# EAGLE board DualHBridge-ULN2803-1.0 (EAGLE 6.4)
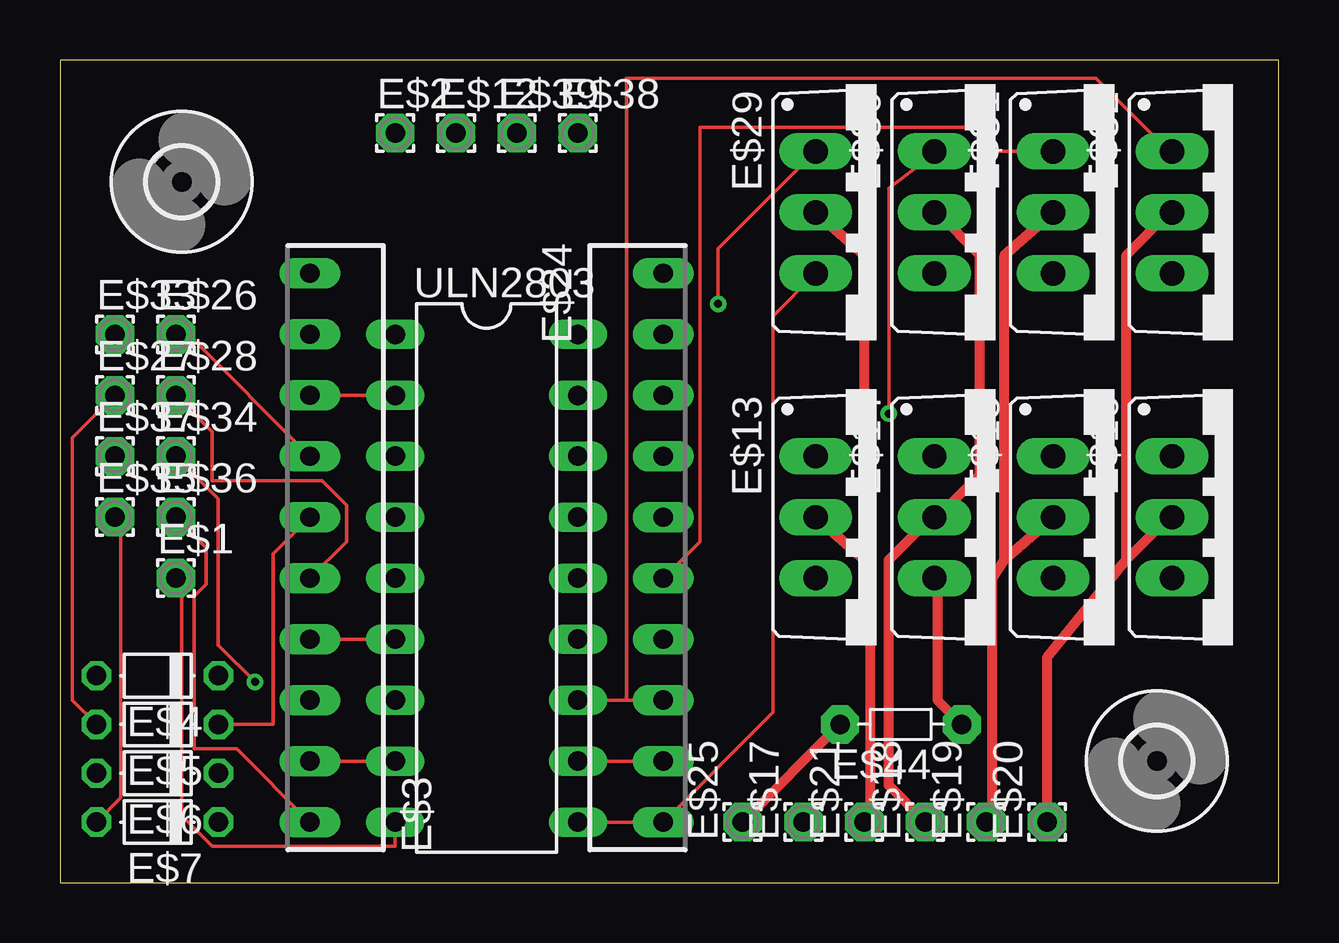
[diagram p0: board, top side]
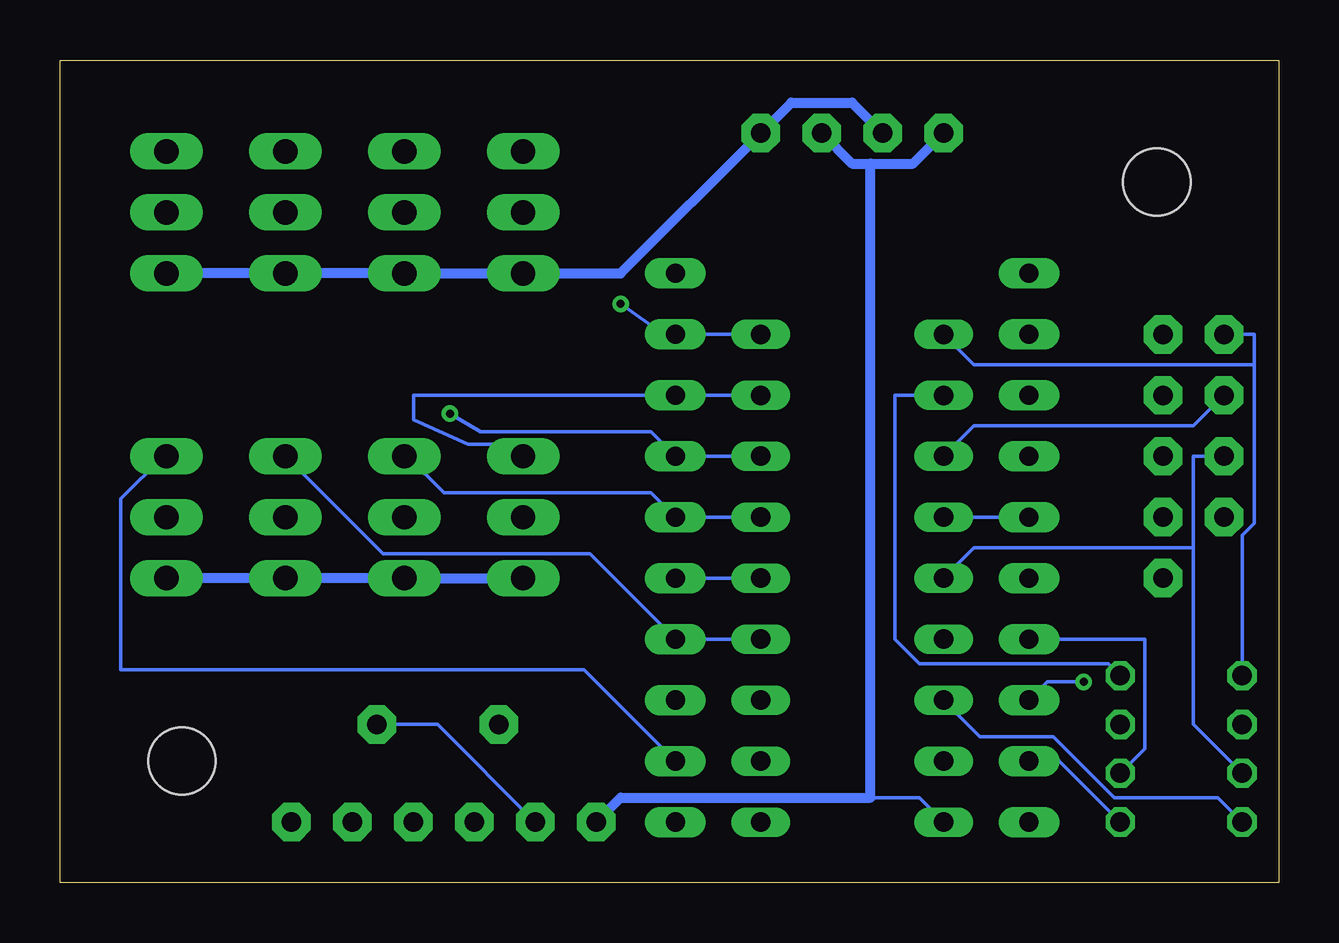
[diagram p1: board, bottom side, seen from below]

Size 50.8 x 34.29 mm. Coordinates in mm from the lower left corner, seen from the top.
Outline: 0,34.29 0,0 50.8,0 50.8,34.29 0,34.29
Copper layers (1*16): Top 0.0356mm / dielectric 1.5011mm / Bottom 0.0356mm
Design rules "LaenPCBOrder": minimum track width 6mil, minimum drill 13mil, track to track 6mil, track to pad 6mil, pad to pad 6mil, via to via 6mil, smd to smd 6mil, copper to edge 15mil, drill to drill 6mil, minimum pad ring 7mil, minimum via ring 7mil, stop-mask expansion 4mil, vias tented up to drill 0mil, thermal gap 10mil

## Footprints (pad centres in the part's own frame; a part is rotated, then mirrored left to right if it is on the bottom)
1,6/0,8 = drill 0.813 pad 1.6 octagon: 1 0,0
SIP-10 = drill 0.8 pad 1.27 long: 1 -11.43,0; 2 -8.89,0; 3 -6.35,0; 4 -3.81,0; 5 -1.27,0; 6 1.27,0; 7 3.81,0; 8 6.35,0; 9 8.89,0; 10 11.43,0
D-5 = drill 0.813 octagon: A 2.54,0; C -2.54,0
TO220V = drill 1.016 long: 1 -2.54,-2.54; 2 0,-2.54; 3 2.54,-2.54
2,8 = hole 2.8: 0,0
R-5 = drill 0.813 pad 1.6 octagon: 1 -2.54,0; 2 2.54,0
DIL18 = drill 0.813 long: 1 -10.16,-3.81; 2 -7.62,-3.81; 3 -5.08,-3.81; 4 -2.54,-3.81; 5 0,-3.81; 6 2.54,-3.81; 7 5.08,-3.81; 8 7.62,-3.81; 9 10.16,-3.81; 10 10.16,3.81; 11 7.62,3.81; 12 5.08,3.81; 13 2.54,3.81; 14 0,3.81; 15 -2.54,3.81; 16 -5.08,3.81; 17 -7.62,3.81; 18 -10.16,3.81

## Placement (x,y rotation side)
E$1  [1,6/0,8]  4.83,12.7 0 top
E$2  [1,6/0,8]  13.97,31.24 0 top
E$3  [SIP-10]  10.41,13.97 90 top
E$4  [D-5]  4.06,8.64 180 top
E$5  [D-5]  4.06,6.6 180 top
E$6  [D-5]  4.06,4.57 180 top
E$7  [D-5]  4.06,2.54 180 top
E$12  [1,6/0,8]  16.51,31.24 0 top
E$13  [TO220V]  34.04,15.24 270 top
E$14  [TO220V]  38.99,15.24 270 top
E$15  [TO220V]  43.94,15.24 270 top
E$16  [TO220V]  48.9,15.24 270 top
E$17  [1,6/0,8]  30.99,2.54 90 top
E$18  [1,6/0,8]  36.07,2.54 90 top
E$19  [1,6/0,8]  38.61,2.54 90 top
E$20  [1,6/0,8]  41.15,2.54 90 top
E$21  [1,6/0,8]  33.53,2.54 90 top
E$24  [SIP-10]  25.15,13.97 270 top
E$25  [1,6/0,8]  28.45,2.54 90 top
E$26  [1,6/0,8]  4.83,22.86 0 top
E$27  [1,6/0,8]  2.29,20.32 0 top
E$28  [1,6/0,8]  4.83,20.32 0 top
E$29  [TO220V]  34.04,27.94 270 top
E$30  [TO220V]  38.99,27.94 270 top
E$31  [TO220V]  43.94,27.94 270 top
E$32  [TO220V]  48.9,27.94 270 top
E$33  [1,6/0,8]  2.29,22.86 0 top
E$34  [1,6/0,8]  4.83,17.78 0 top
E$35  [1,6/0,8]  2.29,15.24 0 top
E$36  [1,6/0,8]  4.83,15.24 0 top
E$37  [1,6/0,8]  2.29,17.78 0 top
E$38  [1,6/0,8]  21.59,31.24 0 top
E$39  [1,6/0,8]  19.05,31.24 0 top
E$40  [2,8]  5.08,29.21 0 top
E$42  [2,8]  45.72,5.08 0 top
E$44  [R-5]  35.05,6.6 180 top
ULN2803  ULN2803  [DIL18]  17.78,12.7 270 top

## Library data of the parts
E$1 E$2 E$12 E$17-E$21 E$25-E$28 E$33-E$39 = wirepad
E$3 E$24 = linear
E$4-E$7 = diode
E$13-E$16 E$29-E$32 = transistor-pnp
E$40 E$42 = holes
E$44 = discrete
ULN2803 = 40xx

## Nets
S$1: E$12.1 E$24.10 E$29.3 E$30.3 E$31.3 E$32.3 E$38.1 ULN2803.10
S$2: E$3.7 E$26.1
S$3: E$3.8 E$4.C ULN2803.2
S$4: E$3.6 E$5.C ULN2803.4
S$5: E$3.4 E$6.C ULN2803.6
S$6: E$24.2 E$29.1 ULN2803.18
S$7: E$24.6 E$31.1 ULN2803.14
S$8: E$13.1 E$24.3 ULN2803.17
S$9: E$24.4 E$30.1 ULN2803.16
S$10: E$14.1 E$24.5 ULN2803.15
S$11: E$4.A E$33.1 ULN2803.1
S$12: E$1.1 E$2.1 E$25.1 E$39.1 E$44.2 ULN2803.9
S$13: E$15.1 E$24.7 ULN2803.13
S$14: E$24.8 E$32.1 ULN2803.12
S$15: E$16.1 E$24.9 ULN2803.11
S$16: E$3.5 E$28.1
S$17: E$5.A E$27.1 ULN2803.3
S$18: E$3.3 E$34.1
S$19: E$6.A E$37.1 ULN2803.5
S$20: E$3.1 E$36.1
S$21: E$7.A E$35.1 ULN2803.7
S$22: E$3.2 E$7.C ULN2803.8
S$24: E$13.3 E$14.3 E$15.3 E$16.3 E$17.1 E$44.1
S$25: E$13.2 E$21.1 E$29.2
S$26: E$14.2 E$18.1 E$30.2
S$27: E$15.2 E$19.1 E$31.2
S$28: E$16.2 E$20.1 E$32.2

## Tracks (layer width: path | path; a pad name or v marks a point on that pad's centre or on a via)
S$1
  Top 0.152: ULN2803.10 E$24.10 29.72,7.11 29.72,23.62 E$29.3
  Bottom 0.406: E$12.1 17.78,32.51 20.32,32.51 E$38.1 27.43,25.4 E$29.3 E$30.3 E$31.3 E$32.3
S$2
  Top 0.152: E$3.7 5.33,22.86 E$26.1
S$3
  Top 0.152: ULN2803.2 E$3.8
  Bottom 0.152: E$4.C 7.11,9.14 14.99,9.14 16,10.16 16,20.32 ULN2803.2
S$4
  Top 0.152: E$5.C 8.89,6.6 8.89,13.72 E$3.6
  Bottom 0.152: E$3.6 ULN2803.4
S$5
  Top 0.152: E$3.4 ULN2803.6
  Bottom 0.152: E$6.C 5.59,5.59 5.59,10.16 E$3.4
S$6  (via drill 0.33)
  Top 0.152: E$29.1 27.43,26.42 v27.43,24.13
  Bottom 0.152: ULN2803.18 E$24.2 25.65,22.86 v27.43,24.13
S$7
  Top 0.152: E$31.1 38.35,30.48 38.35,30.99 37.85,31.5 26.67,31.5 26.67,14.22 E$24.6
  Bottom 0.152: E$24.6 ULN2803.14
S$8
  Bottom 0.152: ULN2803.17 E$24.3 36.07,20.32 36.07,19.3 33.78,18.29 32,18.29 E$13.1
S$9  (via drill 0.33)
  Top 0.152: v34.54,19.56 34.54,28.96 36.58,30.48 E$30.1
  Bottom 0.152: ULN2803.16 E$24.4 26.16,18.8 33.27,18.8 v34.54,19.56
S$10
  Bottom 0.152: ULN2803.15 E$24.5 26.16,16.26 34.8,16.26 36.32,17.78 E$14.1
S$11
  Bottom 0.152: E$4.A 1.52,14.48 1.02,14.99 1.02,21.59 | 1.02,21.59 1.02,22.86 E$33.1 | ULN2803.1 12.7,21.59 1.02,21.59
S$12
  Top 0.152: E$1.1 5.08,12.45 5.08,2.79 6.35,1.52 13.97,1.52 ULN2803.9
  Top 0.406: E$25.1 E$44.2
  Bottom 0.152: ULN2803.9 14.99,3.56 17.02,3.56
  Bottom 0.406: E$2.1 15.24,29.97 17.02,29.97 | 17.02,29.97 17.78,29.97 E$39.1 | E$25.1 27.43,3.56 17.02,3.56 17.02,29.97
S$13
  Bottom 0.152: ULN2803.13 E$24.7 28.7,13.72 37.34,13.72 E$15.1
S$14
  Top 0.152: E$24.8 23.62,7.62 | 23.62,7.62 ULN2803.12 | 23.62,7.62 23.62,33.53 43.18,33.53 46.23,30.48 E$32.1
S$15
  Top 0.152: E$24.9 ULN2803.11
  Bottom 0.152: E$24.9 28.96,8.89 48.26,8.89 48.26,16 46.48,17.78 E$16.1
S$16
  Top 0.152: E$3.5 11.94,14.22 11.94,15.75 10.92,16.76 6.35,16.76 6.35,18.8 E$28.1
S$17
  Top 0.152: E$5.A 0.51,7.62 0.51,18.54 E$27.1
  Bottom 0.152: ULN2803.3 12.7,19.05 3.56,19.05 E$27.1
S$18  (via drill 0.33)
  Top 0.152: v8.13,8.38 6.6,9.91 6.6,16 E$34.1
  Bottom 0.152: E$3.3 9.65,8.38 v8.13,8.38
S$19
  Bottom 0.152: E$6.A 3.56,6.6 3.56,13.97 | 3.56,13.97 3.56,17.78 E$37.1 | ULN2803.5 12.7,13.97 3.56,13.97
S$20
  Top 0.152: E$3.1 7.37,5.59 5.59,5.59 5.59,11.94 6.1,12.45 6.1,13.97 E$36.1
S$21
  Top 0.152: E$7.A 2.54,3.56 2.54,14.99 E$35.1
  Bottom 0.152: ULN2803.7 12.45,6.1 9.4,6.1 6.86,3.56 2.54,3.56 E$7.A
S$22
  Top 0.152: E$3.2 ULN2803.8
  Bottom 0.152: E$7.C 9.14,5.08 E$3.2
S$24
  Top 0.152: 36.58,12.7 E$14.3
  Top 0.406: E$44.1 36.58,7.62 36.58,12.7
  Bottom 0.152: E$17.1 35.05,6.6 E$44.1
  Bottom 0.406: E$13.3 E$14.3 E$15.3 E$16.3
S$25
  Top 0.152: E$21.1 33.78,2.79
  Top 0.406: 33.53,13.46 33.78,12.95 33.78,2.79 | 33.53,13.46 E$13.2 | E$29.2 33.53,26.16 33.53,13.46
S$26
  Top 0.152: 36.32,15.24 E$14.2 | 36.58,27.94 E$30.2
  Top 0.406: 36.32,15.24 34.54,13.46 34.54,4.06 E$18.1 | 36.58,27.94 38.35,26.16 38.35,17.02 36.58,15.24 E$14.2
S$27
  Top 0.406: 39.37,13.46 38.86,12.7 38.86,2.79 E$19.1 | 39.37,13.46 E$15.2 | E$31.2 39.37,26.16 39.37,13.46
S$28
  Top 0.152: 46.23,15.24 E$16.2 | 46.23,27.94 E$32.2
  Top 0.406: 44.45,13.46 41.15,9.4 E$20.1 | 44.45,13.46 46.23,15.24 | 46.23,27.94 44.45,26.16 44.45,13.46

## Text on the board
tNames: Dual H-Bridge | Power In | GND | VDD | GND | VDD | Logic In | P-Channel | H1 | F1 | H2 | F2 | H3 | F3 | H4 | F4 | N-Channel | GND | Shunt | Sense Out | Power Out | H | F | 1 | REF | SNS | O1 | O2 | O3 | O4 | Brent M. Spell